# EAGLE board mother_v2 (EAGLE 5.06)
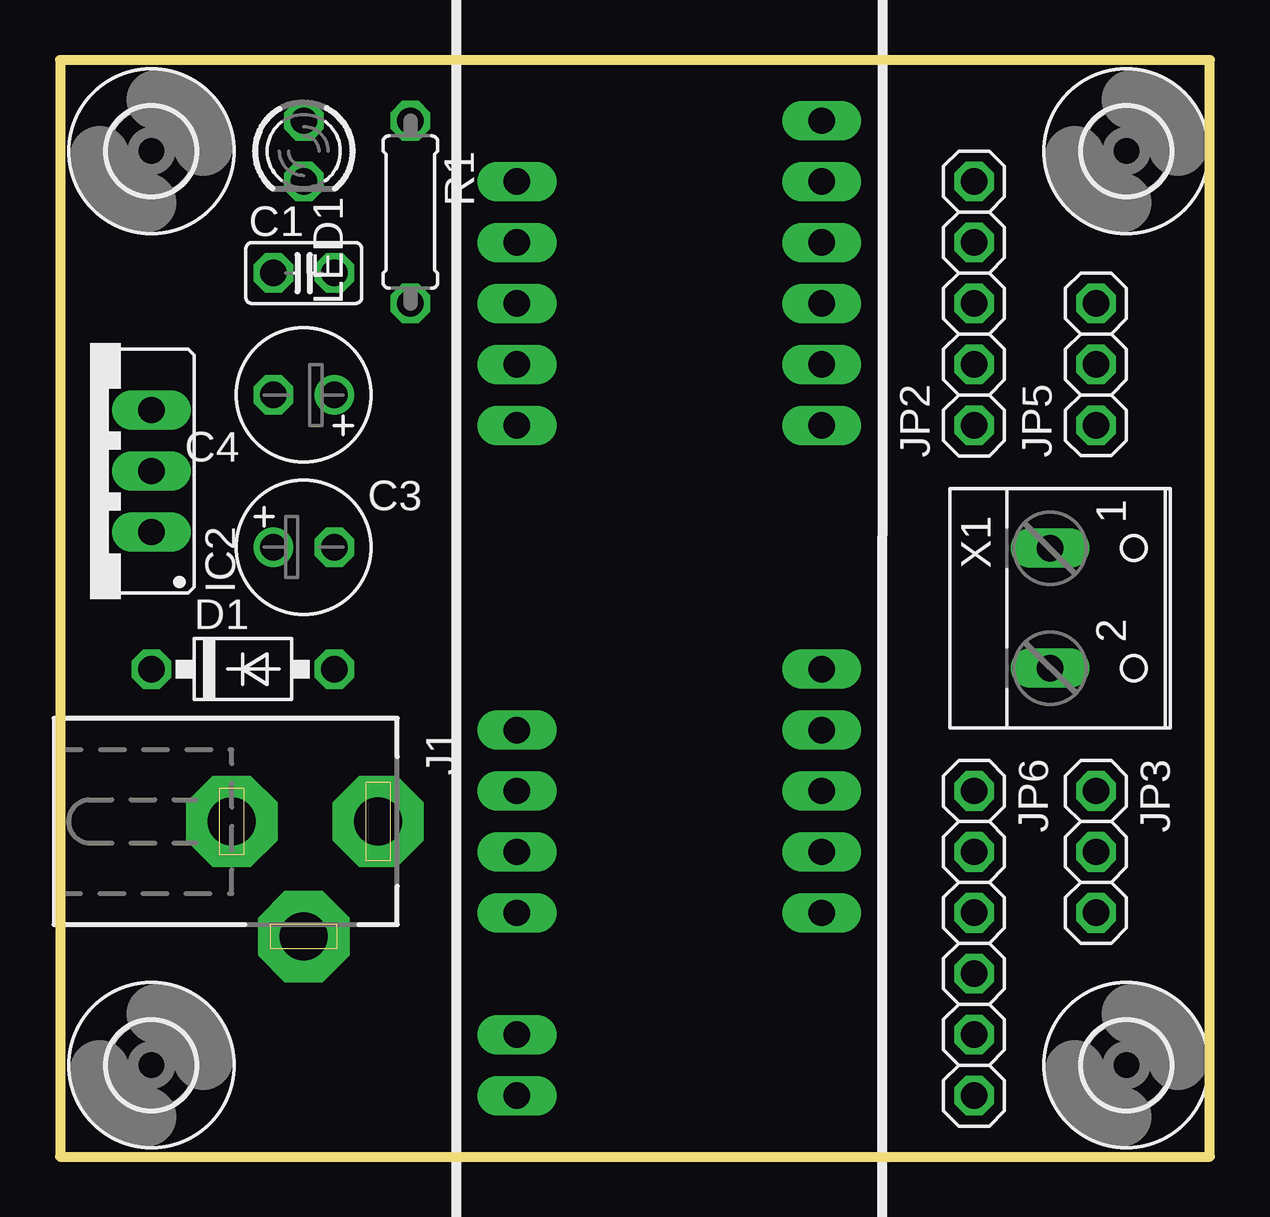
[diagram p0: board, top side]
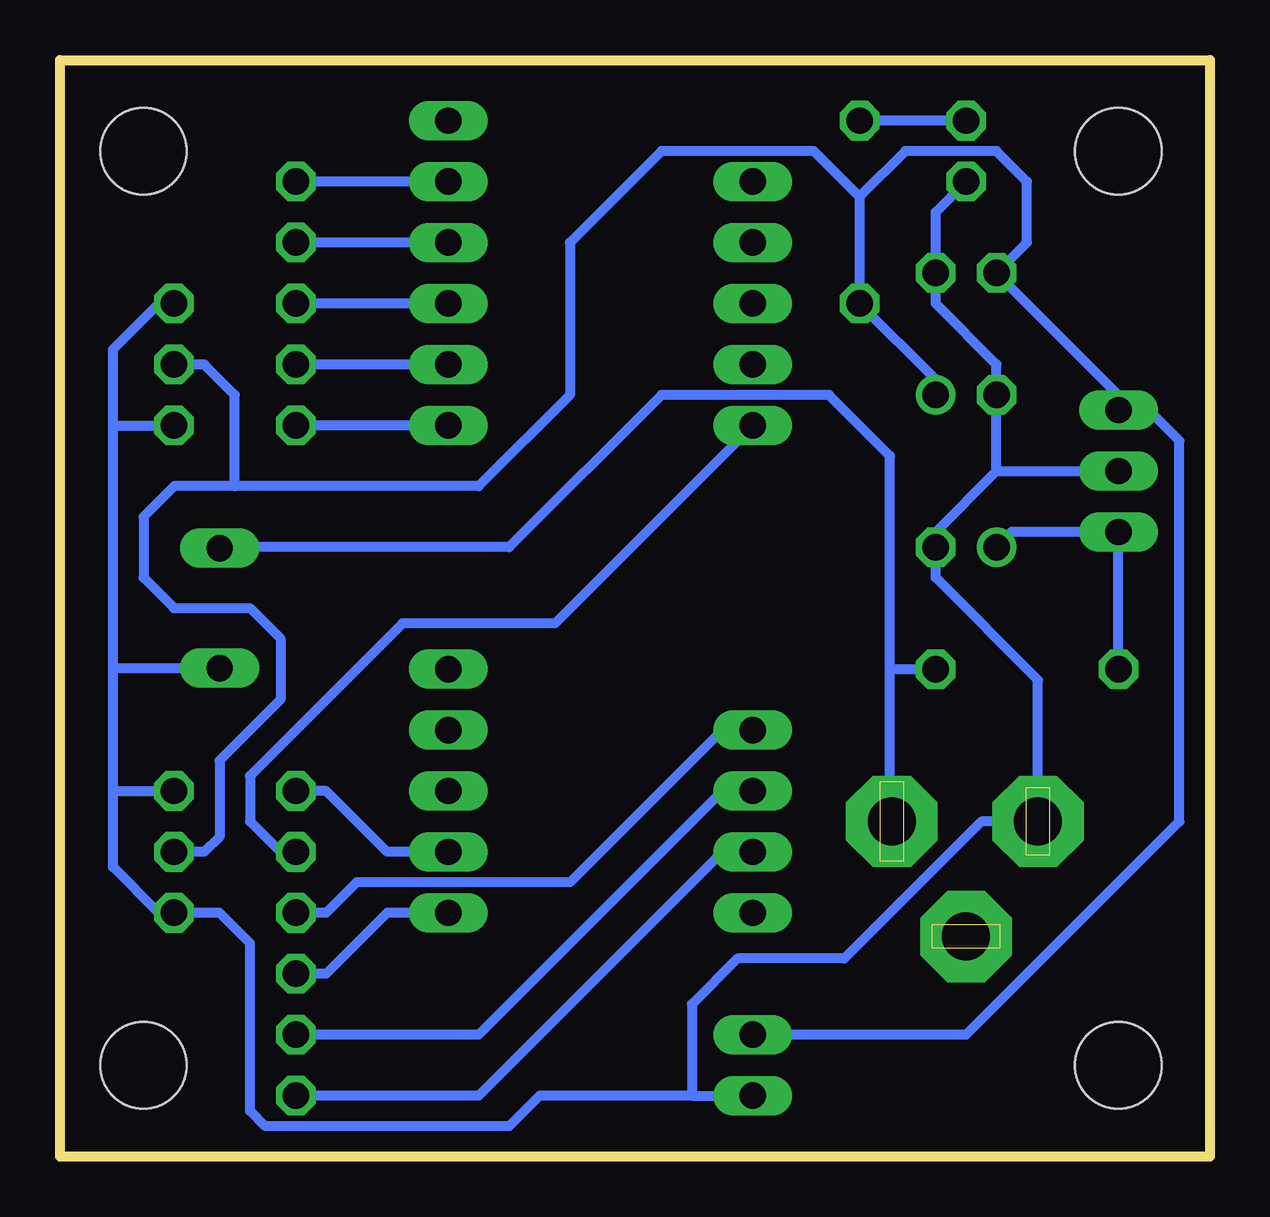
[diagram p1: board, bottom side, seen from below]

Size 47.93 x 45.71 mm. Coordinates in mm from the lower left corner, seen from the top.
Outline: 0,0 47.93,0 47.93,45.71 0,45.71 0,0
Copper layers (1*16): Top 0.035mm / dielectric 1.5mm / Bottom 0.035mm
Design rules "default": minimum track width 10mil, minimum drill 24mil, track to track 8mil, track to pad 8mil, pad to pad 8mil, via to via 8mil, smd to smd 8mil, copper to edge 40mil, drill to drill 8mil, minimum pad ring 10mil, minimum via ring 8mil, stop-mask expansion 4mil, vias tented up to drill 0mil, thermal gap 10mil

## Footprints (pad centres in the part's own frame; a part is rotated, then mirrored left to right if it is on the bottom)
C025-025X050 = drill 1.1 octagon: 1 -1.27,0; 2 1.27,0
E2,5-6 = drill 1.1 round: + -1.27,0 | drill 1.1 pad 1.6 octagon: - 1.27,0
DO41-10 = drill 1.1 octagon: A 3.81,0; C -3.81,0
78XXS = drill 1.1 long: GND 0,-2.54; IN -2.54,-2.54; OUT 2.54,-2.54
DCJ0202A = drill 2 pad 3.81 octagon: 1 0,3.1; 2 4.8,0; 3 0,-3
1X05 = drill 1.1 octagon: 1 -5.08,0; 2 -2.54,0; 3 0,0; 4 2.54,0; 5 5.08,0
1X03 = drill 1.1 octagon: 1 -2.54,0; 2 0,0; 3 2.54,0
1X06 = drill 1.1 octagon: 1 -6.35,0; 2 -3.81,0; 3 -1.27,0; 4 1.27,0; 5 3.81,0; 6 6.35,0
LED3MM = drill 1.1 octagon: A -1.27,0; K 1.27,0
0207/7 = drill 1.1 octagon: 1 -3.81,0; 2 3.81,0
3,6 = hole 3.6: 0,0
CCARD = drill 1.1 long: 1 -15.24,-6.35; 2 -12.7,-6.35; 3 -10.16,-6.35; 4 -7.62,-6.35; 5 -5.08,-6.35; 6 7.62,-6.35; 7 10.16,-6.35; 8 12.7,-6.35; 9 15.24,-6.35; 10 20.32,-6.35; 11 22.86,-6.35; 12 15.24,6.35; 13 12.7,6.35; 14 10.16,6.35; 15 7.62,6.35; 16 5.08,6.35; 17 -5.08,6.35; 18 -7.62,6.35; 19 -10.16,6.35; 20 -12.7,6.35; 21 -15.24,6.35; 22 -17.78,6.35
W237-102 = drill 1.1 long: 1 -2.5,-1.27; 2 2.5,-1.27

## Placement (x,y rotation side)
C1  [C025-025X050]  10.16,36.83 0 top
C3  10uF/25V  [E2,5-6]  10.16,25.4 0 top
C4  100uF/16V  [E2,5-6]  10.16,31.75 180 top
D1  1N4001  [DO41-10]  7.62,20.32 0 top
IC2  7805  [78XXS]  1.27,28.57 90 top
J1  [DCJ0202A]  10.16,13.97 270 top
JP2  [1X05]  38.1,35.56 90 top
JP3  [1X03]  43.18,12.7 270 top
JP5  [1X03]  43.18,33.02 90 top
JP6  [1X06]  38.1,8.89 270 top
LED1  [LED3MM]  10.16,41.91 270 top
R1  [0207/7]  14.61,39.37 270 top
U$1  [3,6]  3.81,3.81 0 top
U$2  [3,6]  3.81,41.91 0 top
U$3  [3,6]  44.45,41.91 0 top
U$4  [3,6]  44.45,3.81 0 top
U$5  CCARD  [CCARD]  25.4,25.4 270 top
X1  [W237-102]  42.55,22.86 270 top

## Library data of the parts
C1 C3 C4 D1 IC2 J1 JP2 JP3 JP5 JP6 LED1 R1 U$1-U$5 X1 = carrinho

## Nets
+5V: C1.1 C4.+ IC2.OUT JP3.2 JP5.2 R1.2 U$5.10
EN_A: JP6.1 U$5.13
EN_B: JP6.4 U$5.12
GND: C1.2 C3.- C4.- IC2.GND J1.3 JP3.1 JP3.3 JP5.1 JP5.3 LED1.K U$5.11 X1.2
N$1: D1.A J1.1 X1.1
N$2: JP2.1 U$5.17
N$3: JP2.2 U$5.18
N$4: JP2.3 U$5.19
N$5: JP2.4 U$5.20
N$6: JP2.5 U$5.21
N$7: JP6.6 U$5.8
N$8: JP6.5 U$5.7
N$9: JP6.3 U$5.6
N$10: JP6.2 U$5.5
N$11: LED1.A R1.1
N$23: C3.+ D1.C IC2.IN

## Tracks (layer width: path | path; a pad name or v marks a point on that pad's centre or on a via)
+5V
  Bottom 0.406: C4.+ 11.43,32.38 R1.2 14.61,40.01 | JP5.2 41.91,33.02 40.64,31.75 40.64,27.94 | 40.64,27.94 30.48,27.94 26.67,31.75 26.67,38.1 22.86,41.91 16.51,41.91 14.61,40.01 | 40.64,27.94 43.18,27.94 44.45,26.67 44.45,24.13 43.18,22.86 40.01,22.86 38.73,21.59 38.73,19.05 41.27,16.51 41.27,13.34 41.91,12.7 JP3.2 | U$5.10 10.16,5.08 1.27,13.97 1.27,29.84 2.54,31.11 IC2.OUT 3.81,31.75 C1.1 7.62,38.1 7.62,40.64 8.89,41.91 12.7,41.91 14.61,40.01
EN_A
  Bottom 0.406: U$5.13 34.29,12.7 36.83,15.24 JP6.1
EN_B
  Bottom 0.406: U$5.12 34.29,10.16 36.83,7.62 JP6.4
GND
  Bottom 0.406: 8.89,28.57 IC2.GND | 8.89,28.57 11.43,26.04 C3.- 11.43,24.13 7.16,19.86 J1.3 9.53,13.97 15.24,8.26 19.68,8.26 21.59,6.35 21.59,2.54 | 8.89,28.57 C4.- 8.89,33.02 11.43,35.56 C1.2 11.43,39.37 LED1.K | 21.59,2.54 U$5.11 | 21.59,2.54 27.94,2.54 29.21,1.27 39.37,1.27 40.01,1.91 40.01,8.89 41.27,10.16 JP3.3 43.81,10.16 45.72,12.06 45.72,15.24 | 45.72,15.24 45.72,20.32 | 45.72,15.24 JP3.1 | X1.2 45.68,20.36 45.72,20.32 | 45.72,20.32 45.72,30.48 | 45.72,30.48 45.72,33.66 43.81,35.56 JP5.3 | 45.72,30.48 JP5.1
N$1
  Bottom 0.406: J1.1 13.34,14.04 13.34,20.32 | 13.34,20.32 D1.A | 13.34,20.32 13.34,29.21 15.88,31.75 22.86,31.75 29.21,25.4 41.23,25.4 X1.1
N$2
  Bottom 0.406: U$5.17 JP2.1
N$3
  Bottom 0.406: U$5.18 JP2.2
N$4
  Bottom 0.406: U$5.19 JP2.3
N$5
  Bottom 0.406: U$5.20 JP2.4
N$6
  Bottom 0.406: U$5.21 JP2.5
N$7
  Bottom 0.406: U$5.8 20.32,12.7 30.48,2.54 JP6.6
N$8
  Bottom 0.406: U$5.7 20.32,15.24 30.48,5.08 JP6.5
N$9
  Bottom 0.406: JP6.3 36.83,10.16 35.56,11.43 26.67,11.43 20.32,17.78 U$5.6
N$10
  Bottom 0.406: JP6.2 38.73,12.7 40.01,13.97 40.01,15.88 33.66,22.23 27.3,22.23 U$5.5
N$11
  Bottom 0.406: LED1.A R1.1
N$23
  Bottom 0.406: D1.C IC2.IN 8.26,26.04 C3.+